# Altium PCB Power_Board.PcbDoc
Units mil, origin at the board's own origin, x right, y up, seen from the top; angles counter-clockwise.
Board outline 2362.2 x 2952.76 mil, 2 copper layers (Top Layer, Bottom Layer); 35 components, 35 nets, 127 pads, 5 vias.
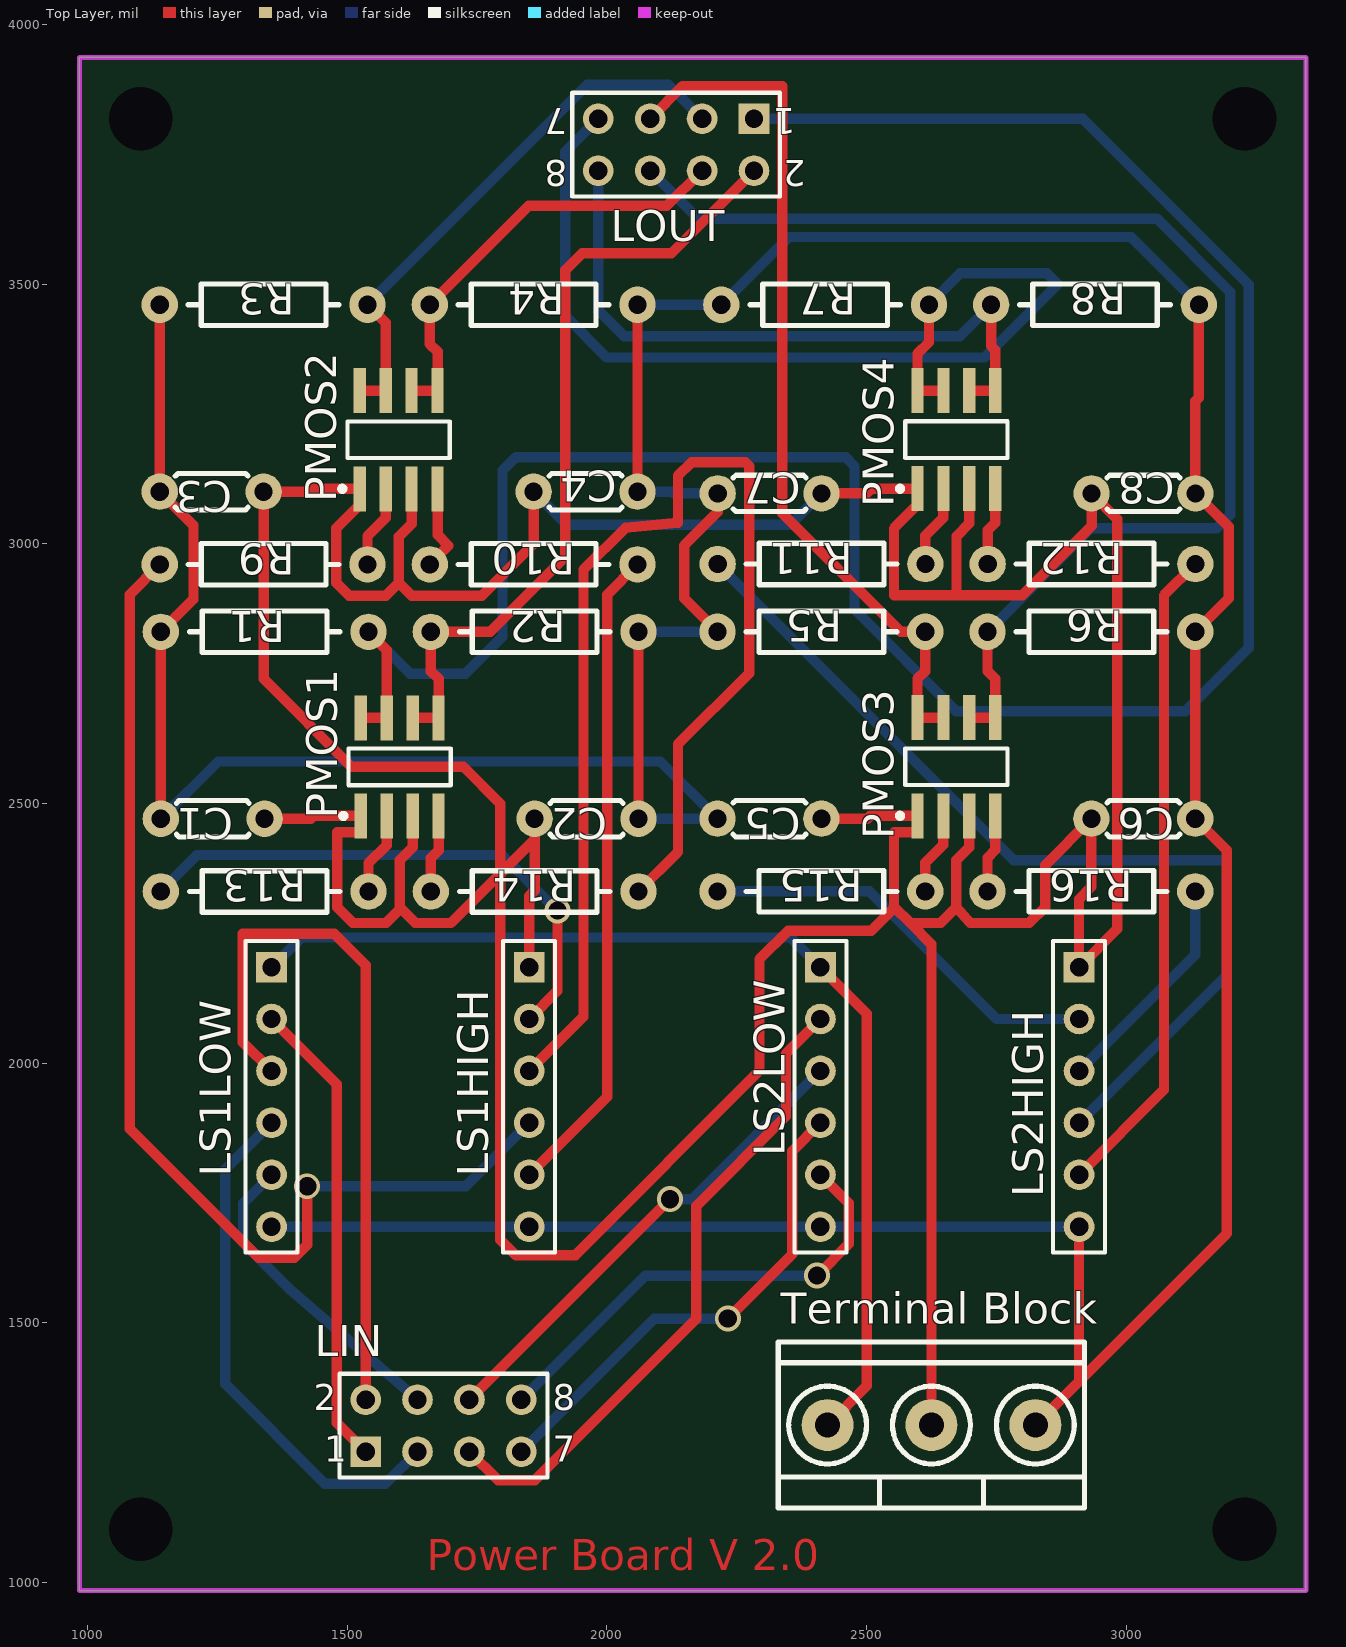
[diagram p0: Top Layer view]
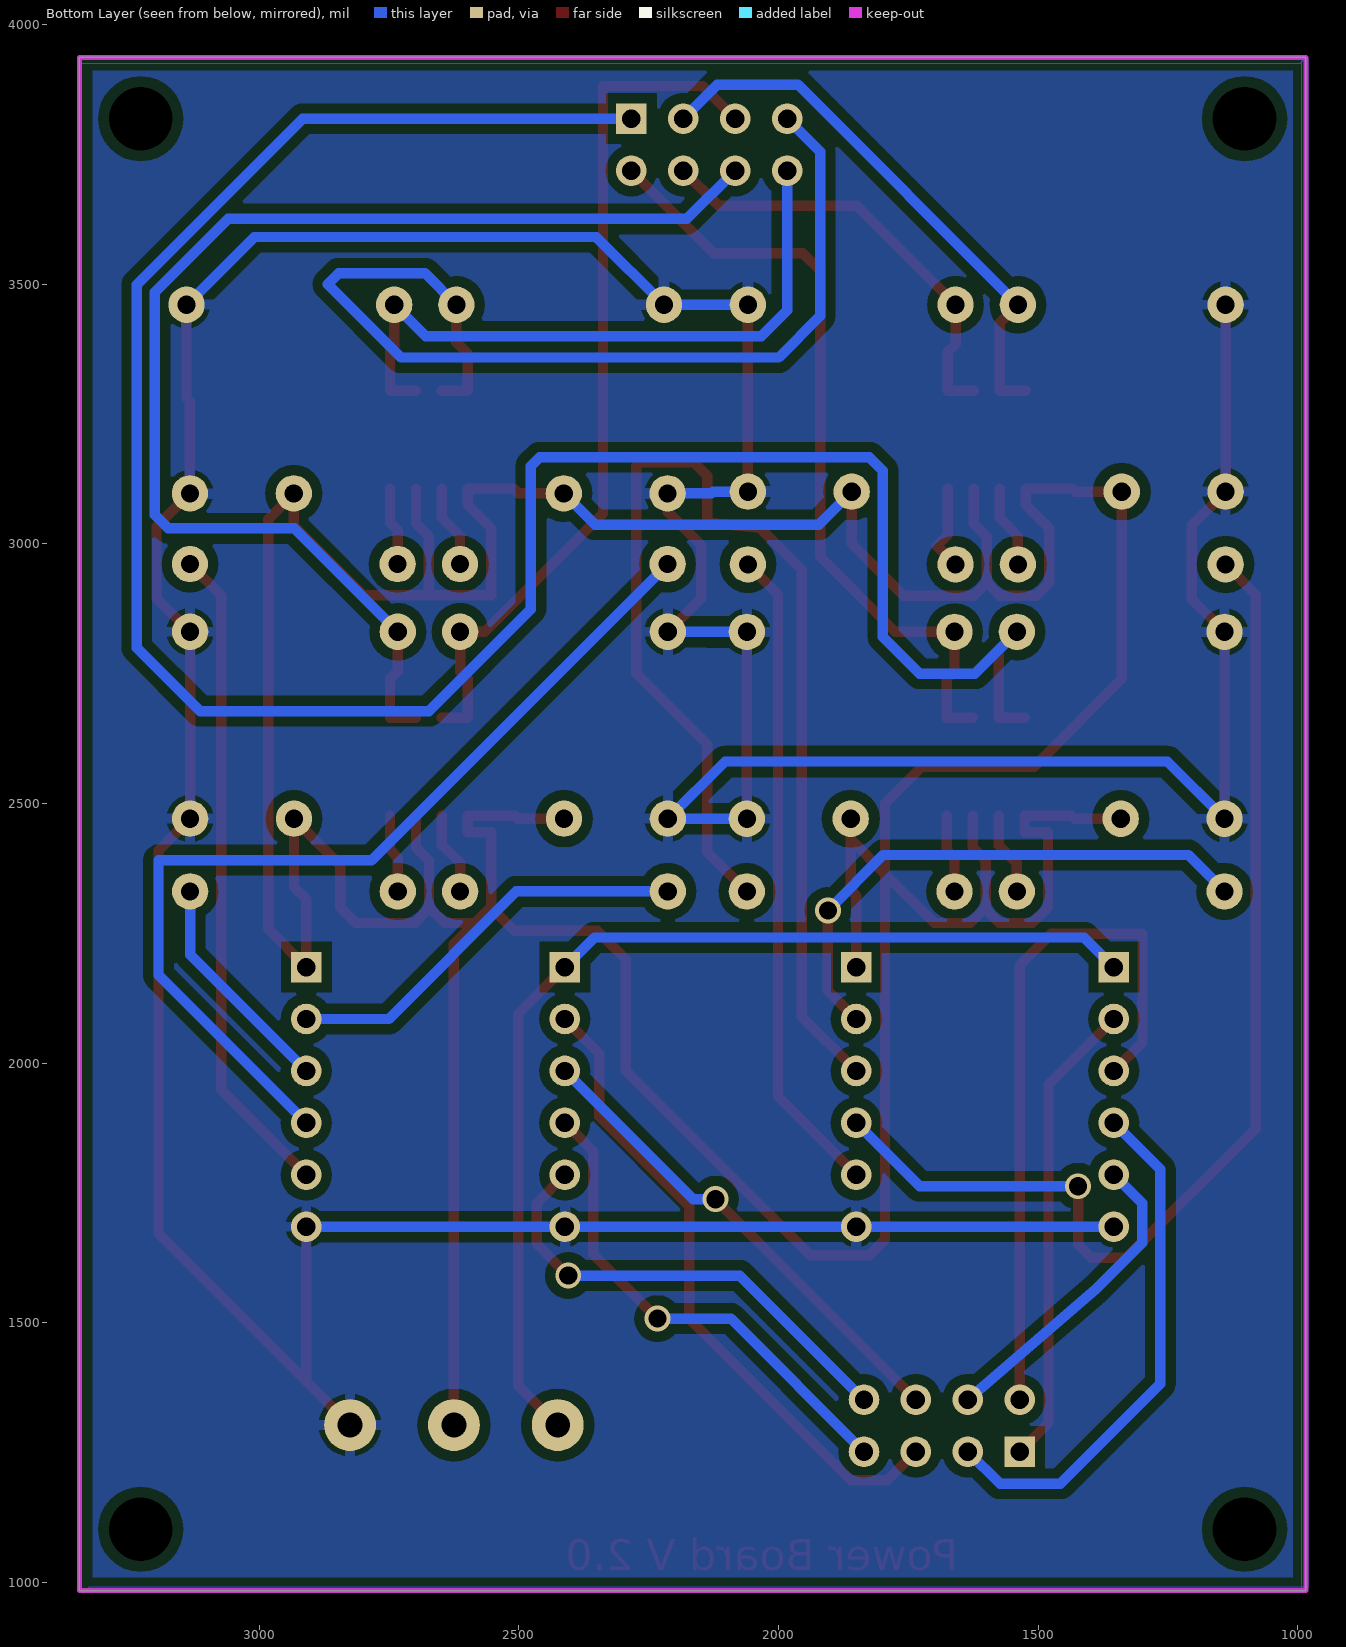
[diagram p1: Bottom Layer view, seen from below]

## Layer stack, top to bottom
Top Layer: signal copper 1.4
Dielectric: dielectric 12.6, FR-4, Dk 4.8
Bottom Layer: signal copper 1.4

## Board outline
984.25,984.25 984.25,3937.01 3346.46,3937.01 3346.46,984.25 984.25,984.25

## Design rules (kind name [scope] priority, off if disabled: settings)
Clearance poly_clear [InPolygon] p1: gap=20
Clearance [All] p2: gap=15
PolygonConnect [All] p1: connectstyle=Relief reliefconductorwidth=20 reliefentries=4 polygonreliefangle="90 Angle" airgapwidth=10
RoutingTopology [All] p1: topology=Daisy_Balanced
RoutingVias [All] p1: holewidth=35 width=50 viastyle="Through Hole" minholewidth=35 minwidth=50 maxholewidth=35 maxwidth=50
SolderMaskExpansion [All] p1: expansion=4
Width [All] p1: maxlimit=20 minlimit=15 preferedwidth=20
27 further rules are at their usual default settings.

## Components (designator, comment, footprint, x,y, rotation, side; value= is the part's Value field where it differs from the comment)
C1 "CAP" RAD0.2A 1141.02,2470.71 r90 top
C2 "CAP" RAD0.2A 1861.02,2470.71 r90 top
C3 "CAP" RAD0.2A 1139.06,3100.63 r90 top
C4 "CAP" RAD0.2A 1859.06,3100.63 r90 top
C5 "CAP" RAD0.2A 2213.23,2470.87 r90 top
C6 "CAP" RAD0.2A 2933.23,2470.87 r90 top
C7 "CAP" RAD0.2A 2213.54,3097.32 r90 top
C8 "CAP" RAD0.2A 2933.54,3097.32 r90 top
LIN "Header 4X2" HDR2X4 1535.43,1251.97 r0 top
LOUT "Header 4X2" HDR2X4 2283.46,3818.9 r180 top
LS1HIGH "Header 6" HDR1X6 1850.39,2185.04 r270 top
LS1LOW "Header 6" HDR1X6 1354.33,2185.04 r270 top
LS2HIGH "Header 6" HDR1X6 2909.45,2185.04 r270 top
LS2LOW "Header 6" HDR1X6 2411.42,2185.04 r270 top
PMOS1 "AUIRF7304Q" AUIRF7304Q 1601.02,2570.71 r90 top
PMOS2 "AUIRF7304Q" AUIRF7304Q 1599.06,3200.63 r90 top
PMOS3 "AUIRF7304Q" AUIRF7304Q 2673.23,2570.87 r90 top
PMOS4 "AUIRF7304Q" AUIRF7304Q 2673.23,3200.79 r90 top
R1 "Res1" AXIAL0.4 1141.02,2830.71 r90 top
R2 "Res1" AXIAL0.4 1661.02,2830.71 r90 top
R3 "Res1" AXIAL0.4 1139.06,3460.63 r90 top
R4 "Res1" AXIAL0.4 1659.06,3460.63 r90 top
R5 "Res1" AXIAL0.4 2213.23,2830.87 r90 top
R6 "Res1" AXIAL0.4 2733.23,2830.87 r90 top
R7 "Res1" AXIAL0.4 2220.47,3460.63 r90 top
R8 "Res1" AXIAL0.4 2740.16,3460.63 r90 top
R9 "Res1" AXIAL0.4 1139.06,2960.63 r90 top
R10 "Res1" AXIAL0.4 2059.06,2960.63 r270 top
R11 "Res1" AXIAL0.4 2213.54,2961.26 r90 top
R12 "Res1" AXIAL0.4 3133.54,2961.26 r270 top
R13 "Res1" AXIAL0.4 1141.02,2330.71 r90 top
R14 "Res1" AXIAL0.4 2061.02,2330.71 r270 top
R15 "Res1" AXIAL0.4 2213.23,2330.87 r90 top
R16 "Res1" AXIAL0.4 3133.23,2330.87 r270 top
"Terminal Block" "3 way Terminal Block" PCTB3N 2425.2,1303.15 r0 top

## Footprints (in the part's own frame and the unit in brackets; to place one, negate y for a bottom-side part, rotate by r counter-clockwise, add the part's x,y. Pads: shape width x height; smd on the part's side, far side on the other; paste and mask are expansions set on the pad)
AUIRF7304Q [mm] "SOIC, 8-Leads, Body 4.90x3.90mm, Pitch 1.27mm, IPC Medium Density"
  rect 2.2x0.6 smd: 1(-2.4,1.905) 2(-2.4,0.635) 3(-2.4,-0.635) 4(-2.4,-1.905) 5(2.4,-1.905) 6(2.4,-0.635) 7(2.4,0.635) 8(2.4,1.905)
  silkscreen extent -2.52,-2.5 0.9,2.88, body extent -2,-2.5 2,2.5, height 1.75
AXIAL0.4 [mil]
  round 70 hole 35: 1(0,0) 2(0,-400)
  silkscreen extent -40,-345 40,-55
HDR1X6 [mm] "Connector; Header; 6 Position"
  rect 1.5x1.5 hole 0.9: 1(0,0)
  round 1.5 hole 0.9: 2(2.54,0) 3(5.08,0) 4(7.62,0) 5(10.16,0) 6(12.7,0)
  silkscreen extent -1.27,-1.27 13.97,1.27
HDR2X4 [mm] "Connector; Header; 4x2 Position"
  rect 1.5x1.5 hole 0.9: 1(0,0)
  round 1.5 hole 0.9: 2(0,2.54) 3(2.54,0) 4(2.54,2.54) 5(5.08,0) 6(5.08,2.54) 7(7.62,0) 8(7.62,2.54)
  silkscreen extent -1.27,-1.27 8.89,3.81
PCTB3N [mil]
  round 100 hole 48: 1(0,0) 2(200,0) 3(400,0)
  silkscreen extent -95,-160 495,160
RAD0.2A [mil]
  round 70 hole 35: 1(0,0) 2(0,-200)
  silkscreen extent -35,-170 35,-30

## Part data
C1 C2 C3 C4 C5 C6 C7 C8: "Capacitor"
LIN LOUT: "Header, 4-Pin, Dual row"
LS1HIGH LS1LOW LS2HIGH LS2LOW: "Header, 6-Pin"
PMOS1 PMOS2 PMOS3 PMOS4 "Terminal Block": library part Component_1
R1 R2 R3 R4 R5 R6 R7 R8 R9 R10 R11 R12 R13 R14 R15 R16: "Resistor"

## Free pads (board coordinates)
  round 60 hole 123: 0(3228.35,3818.9) 1(1102.36,3818.9) 2(1102.36,1102.36) 3(3228.35,1102.36)

## Via types
v1: diameter 50, hole 35, Top Layer to Bottom Layer, 5 vias

## Nets (pads, with @x,y where several pads share a name; then routed paths per layer and width w, separated by ;. In a path a pad name is that pad's centre, name@x,y a point inside that pad or via, vN(x,y) a via of type N, cw(c..) or ccw(c..) an arc to the next point about the centre after c; other vN are vias at no path point)
3.3VCC: "Terminal Block.1" LS1LOW.1 LS2LOW.1 | length 2054.6
  Top Layer w20: LS2LOW.1 2500.95,2095.51 2500.95,1378.9 2425.2,1303.15
  Bottom Layer w20: LS1LOW.1 1411.29,2242 2354.46,2242 LS2LOW.1
5VCC: "Terminal Block.2" C1.2 C2.1 C3.2 C4.1 C5.2 C6.1 C7.2 C8.1 LS1HIGH.1 LS2HIGH.1 PMOS1.1 PMOS1.3 PMOS2.1 PMOS2.3 PMOS3.1 PMOS3.3 PMOS4.1 PMOS4.3 | length 10553.1
  Top Layer w20: C1.2 1430,2470.71 1435.51,2476.22 PMOS1.1 1526.02,2445 1481,2445 1481,2300 1511,2270 1575,2270 1603.01,2298.01 ; PMOS2.3 1624.06,3039 1599.06,3014 1599.06,2925 ; PMOS1.3 1626.02,2416 1601.02,2391 1601.02,2300 1603.01,2298.01 ; LS1HIGH.1 1850.39,2322 1861.02,2332.63 1861.02,2431.02 ; C4.1 1859.06,3000 1759.06,2900 1624.06,2900 1599.06,2925 ; C2.1 1861.02,2431.02 ; C5.2 2502,2470.87 2507.51,2476.38 PMOS3.1 2598.23,2445 2553,2445 2553,2300 2553.5,2299.5 ; C7.2 2501,3097.32 2509.98,3106.3 PMOS4.1 2598.23,3075 2553,3029.77 2553,2901 2673.54,2901 ; 2625.2,1303.15 2625.2,2228.8 2584,2270 ; PMOS3.3 2698.23,2416 2673.23,2391 2673.23,2300 ; PMOS4.3 2698.23,3039.68 2673.54,3015 2673.54,2901 ; 1599.06,2925 1574.06,2900 1504,2900 1479,2925 1479,3029.94 1524.06,3075 PMOS2.1 1433.51,3106.14 1428,3100.63 C3.2 1339.06,2739.94 1508,2571 1724,2571 1795,2500 1795,2365 ; 1603.01,2298.01 1631.02,2270 1700,2270 1795,2365 ; 1795,2365 1861.02,2431.02 ; 1795,2365 1795,1660 1825,1630 1939,1630 2294,1985 2294,2200 2349,2255 2509,2255 2553.5,2299.5 ; 2553.5,2299.5 2554,2300 2584,2270 ; 2584,2270 2643.23,2270 2673.23,2300 ; 2673.23,2300 2700,2270 2814,2270 2844,2300 2844,2381.64 C6.1 2933.23,2339.78 2909.45,2316 LS2HIGH.1 2983,2258.59 2983,3047.87 C8.1 2933.54,3034.54 2800,2901 2673.54,2901
  Bottom Layer w20: C4.1 1922.69,3037 2353.22,3037 C7.2
GND: "Terminal Block.3" C1.1 C2.2 C3.1 C4.2 C5.1 C6.2 C7.1 C8.2 LS1HIGH.6 LS1LOW.6 LS2HIGH.6 LS2LOW.6 R1.1 R2.2 R3.1 R4.2 R5.1 R6.2 R7.1 R8.2 | length 9140.2
  Top Layer w20: R3.1 C3.1 1204,3035.69 1204,2893.68 R1.1 C1.1 ; C4.2 R4.2 ; C2.2 R2.2 ; R5.1 2149,2895.09 2149,2997 2213.54,3061.54 C7.1 ; 2825.2,1303.15 2909.45,1387.4 ; LS2HIGH.6 2909.45,1387.4 ; R8.2 3140.16,3281.61 3133.54,3275 C8.2 3198,3032.87 3198,2895.64 R6.2 C6.2 3194,2410.09 3194,1671.95 2909.45,1387.4
  Bottom Layer w20: C1.1 1251.32,2581 2103.09,2581 C5.1 2137.16,2470.87 2137,2470.71 C2.2 ; LS1LOW.6 LS1HIGH.6 LS2LOW.6 LS2HIGH.6 ; C4.2 2125.75,3100.63 2129.06,3097.32 C7.1 ; R4.2 R7.1 2350.84,3591 3009.79,3591 R8.2 ; R2.2 2137,2830.71 2137.16,2830.87 R5.1
L1SH: LS1HIGH.2 R13.1 | length 1069
  Top Layer w20: LS1HIGH.2 1905,2139.65 v1(1905,2294)
  Bottom Layer w20: R13.1 1211.32,2401 1798,2401 v1(1905,2294)
L1SL: LIN.1 LS1LOW.2 | length 908.1
  Top Layer w20: LS1LOW.2 1480,1959.37 1480,1307.4 LIN.1
L2SH: LS1HIGH.3 R14.1 | length 2372.8
  Top Layer w20: LS1HIGH.3 1955,2089.65 1955,2950 2036,3031 2137,3041 2137,3131 2163.32,3157.32 2266.68,3157.32 2274,3150 2274,2751 2137,2614 2137,2406.68 R14.1
L2SL: LIN.2 LS1LOW.3 | length 1384.9
  Top Layer w20: LS1LOW.3 1299,2040.37 1299,2249 1475,2249 1535.43,2188.57 LIN.2
L3SH: LS1HIGH.4 R9.1 | length 2157.1
  Top Layer w20: R9.1 1081,2902.57 1081,1874 1330,1625 1398,1625 1423,1650 v1(1423,1763)
  Bottom Layer w20: v1(1423,1763) 1728.35,1763 LS1HIGH.4
L3SL: LIN.3 LS1LOW.4 | length 1015.8
  Bottom Layer w20: LS1LOW.4 1264.8,1795.51 1264.8,1382.2 1457,1190 1573.47,1190 LIN.3
L4SH: LS1HIGH.5 R10.1 | length 1262
  Top Layer w20: LS1HIGH.5 2001,1935.65 2001,2902.57 R10.1
L4SL: LIN.4 LS1LOW.5 | length 605.3
  Bottom Layer w20: LS1LOW.5 1299.8,1730.51 1299.8,1654.2 1389,1565 LIN.4
L5SH: LS2HIGH.2 R15.1 | length 798
  Bottom Layer w20: R15.1 2505.13,2330.87 2750.96,2085.04 LS2HIGH.2
L5SL: LIN.5 LS2LOW.2 | length 1264.8
  Top Layer w20: LIN.5 1790.55,1196.85 1861.38,1196.85 2172,1507.47 2172,1724.68 2345,1897.68 2345,2018.62 LS2LOW.2
L6SH: LS2HIGH.3 R16.1 | length 438.5
  Bottom Layer w20: LS2HIGH.3 3133.23,2208.82 R16.1
L6SL: LIN.6 LS2LOW.3 | length 938.2
  Top Layer w20: LIN.6 v1(2121.47,1738)
  Bottom Layer w20: v1(2121.47,1738) 2164.38,1738 LS2LOW.3
L7SH: LS2HIGH.4 R11.1 | length 1840.5
  Bottom Layer w20: R11.1 2783.8,2391 3194,2391 3194,2169.59 LS2HIGH.4
L7SL: LIN.7 LS2LOW.4 | length 954.6
  Top Layer w20: v1(2233,1508) 2356.89,1631.89 2356.89,1830.51 LS2LOW.4
  Bottom Layer w20: LIN.7 2091.47,1508 v1(2233,1508)
L8SH: LS2HIGH.5 R12.1 | length 1269
  Top Layer w20: LS2HIGH.5 3073,1948.59 3073,2900.72 R12.1
L8SL: LIN.8 LS2LOW.5 | length 910.4
  Top Layer w20: v1(2405,1591) 2465.95,1651.95 2465.95,1730.51 LS2LOW.5
  Bottom Layer w20: LIN.8 2074.47,1591 v1(2405,1591)
LAYER1: LOUT.1 PMOS1.7 PMOS1.8 R1.2 | length 4517.2
  Top Layer w20: PMOS1.8 PMOS1.7 1576.02,2795.71 R1.2
  Bottom Layer w20: R1.2 1621.73,2750 1727.73,2750 1799,2821.27 1799,3141 1825,3167 2460,3167 2477,3150 2477,2874.23 2673.23,2678 3114,2678 3236,2800 3236,3499.14 2916.24,3818.9 LOUT.1
LAYER2: LOUT.2 PMOS1.5 PMOS1.6 R2.1 | length 1535.4
  Top Layer w20: PMOS1.6 PMOS1.5 1676.02,2740 1661.02,2755 R2.1 1775.71,2830.71 1920,2975 1920,3527 1953,3560 2124.57,3560 LOUT.2
LAYER3: LOUT.3 PMOS2.7 PMOS2.8 R3.2 | length 1076.7
  Top Layer w20: PMOS2.8 PMOS2.7 1574.06,3425.63 R3.2
  Bottom Layer w20: R3.2 1962.43,3884 2118.36,3884 LOUT.3
LAYER4: LOUT.4 PMOS2.5 PMOS2.6 R4.1 | length 853.1
  Top Layer w20: PMOS2.6 PMOS2.5 1674.06,3370 1659.06,3385 R4.1 1849.43,3651 2115.57,3651 LOUT.4
LAYER5: LOUT.5 PMOS3.7 PMOS3.8 R5.2 | length 1695.1
  Top Layer w20: LOUT.5 2146.57,3882 2338,3882 2338,3059 2566.13,2830.87 R5.2 2613.23,2755 2598.23,2740 PMOS3.8 PMOS3.7
LAYER6: LOUT.6 PMOS3.5 PMOS3.6 R6.1 | length 2426
  Top Layer w20: PMOS3.6 PMOS3.5 2748.23,2740 2733.23,2755 R6.1
  Bottom Layer w20: LOUT.6 2176.36,3626 3059.64,3626 3201,3484.64 3201,3056 3175,3030 2932.36,3030 R6.1
LAYER7: LOUT.7 PMOS4.7 PMOS4.8 R7.2 | length 1951.5
  Top Layer w20: R7.2 2620.47,3388.24 2598.23,3366 PMOS4.8 PMOS4.7
  Bottom Layer w20: LOUT.7 1920,3755.43 1920,3439 2000,3359 2727,3359 2868,3500 2847,3521 2680.84,3521 R7.2
LAYER8: LOUT.8 PMOS4.5 PMOS4.6 R8.1 | length 1290.1
  Top Layer w20: PMOS4.6 PMOS4.5 2748.23,3373 2740.16,3381.07 R8.1
  Bottom Layer w20: LOUT.8 1983.46,3450 2033.46,3400 2679.53,3400 R8.1
NetPMOS1_2: PMOS1.2 R13.2 | length 160
  Top Layer w20: R13.2 1541.02,2385 1576.02,2420 PMOS1.2
NetPMOS1_4: PMOS1.4 R14.2 | length 151.7
  Top Layer w20: R14.2 1661.02,2395 1676.02,2410 PMOS1.4
NetPMOS2_2: PMOS2.2 R9.2 | length 160
  Top Layer w20: R9.2 1539.06,3015 1574.06,3050 PMOS2.2
NetPMOS2_4: PMOS2.4 R10.2 | length 169.1
  Top Layer w20: R10.2 1695.04,2996.61 1674.06,3017.6 PMOS2.4
NetPMOS3_2: PMOS3.2 R15.2 | length 160
  Top Layer w20: R15.2 2613.23,2386 2648.23,2421 PMOS3.2
NetPMOS3_4: PMOS3.4 R16.2 | length 151.7
  Top Layer w20: R16.2 2733.23,2396 2748.23,2411 PMOS3.4
NetPMOS4_2: PMOS4.2 R11.2 | length 159.4
  Top Layer w20: R11.2 2613.54,3016 2648.23,3050.68 PMOS4.2
NetPMOS4_4: PMOS4.4 R12.2 | length 151.1
  Top Layer w20: R12.2 2733.54,3026 2748.23,3040.68 PMOS4.4

## Polygon pours and split planes (outlines as drawn)
GND on Bottom Layer "Multi-Layer-No Net" (solid, remove dead copper, shelved, pour order 10): 980.32,1003.94 980.32,3933.07 984.25,3937.01 996.06,3925.2 3342.52,3925.2 3342.52,984.25 3338.58,980.32 3326.77,992.13 980.32,992.13
GND on Bottom Layer "Multi-Layer-No Net" (solid, remove dead copper, shelved, pour order 8): 984.25,3937.01 3346.46,3937.01 3346.46,984.25 996.06,984.25 992.13,988.19 992.13,3929.13
GND on Bottom Layer "Multi-Layer-No Net" (solid, remove dead copper, shelved, pour order 2): 984.25,984.25 984.25,3937.01 3346.46,3937.01 3346.46,984.25 984.25,984.25
GND on Bottom Layer "Multi-Layer-No Net" (solid, pour order 14): 984.25,984.25 984.25,3937.01 3307.09,3937.01 3346.46,3937.01 3346.46,984.25 984.25,984.25

## Keep-outs
Keep-Out Layer:
  the board outline again, w10

## Other copper
Top Layer:
  text "Power Board V 2.0" at 1653.54,1023.62 h60

## Text inside footprints (layer, text, board x,y; h text height)
LIN: Top Overlay "2" at 1435.43,1331.97 h50; Top Overlay "1" at 1455.43,1231.97 h50; Top Overlay "7" at 1895.43,1231.97 h50; Top Overlay "8" at 1895.43,1331.97 h50
LOUT: Top Overlay "2" at 2383.46,3738.9 h50 r180; Top Overlay "1" at 2363.46,3838.9 h50 r180; Top Overlay "7" at 1923.46,3838.9 h50 r180; Top Overlay "8" at 1923.46,3738.9 h50 r180